# Altium PCB some_chips.PcbDoc
Units mm, origin at the board's own origin, x right, y up, seen from the top; angles counter-clockwise.
Board outline 254 x 254 mm, 2 copper layers (Top Layer, Bottom Layer); 16 components, 0 nets, 135 pads, 0 vias.
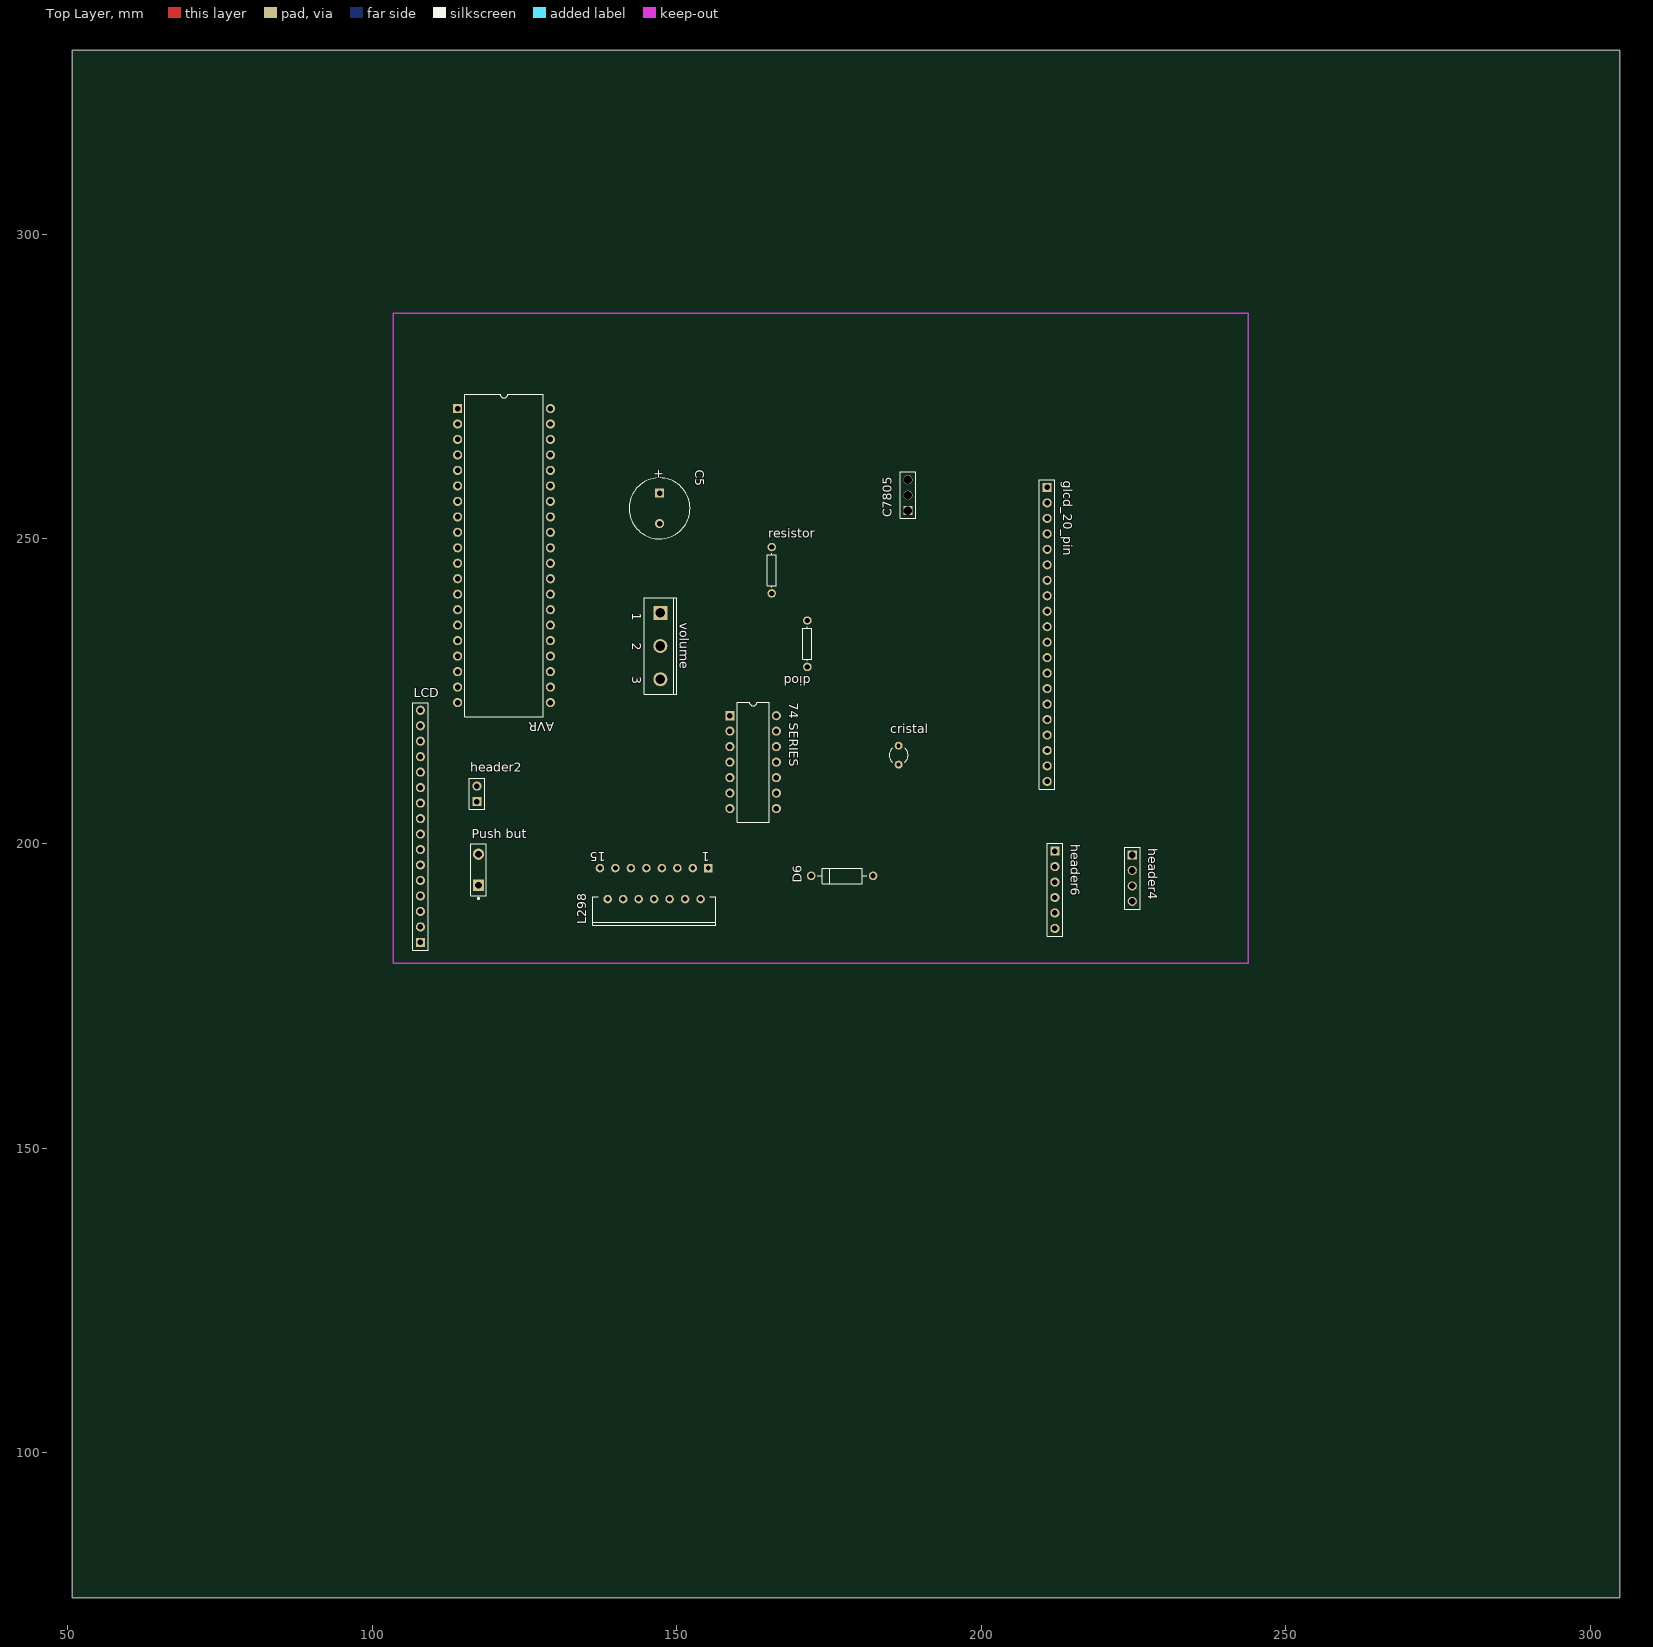
[diagram p0: Top Layer view]
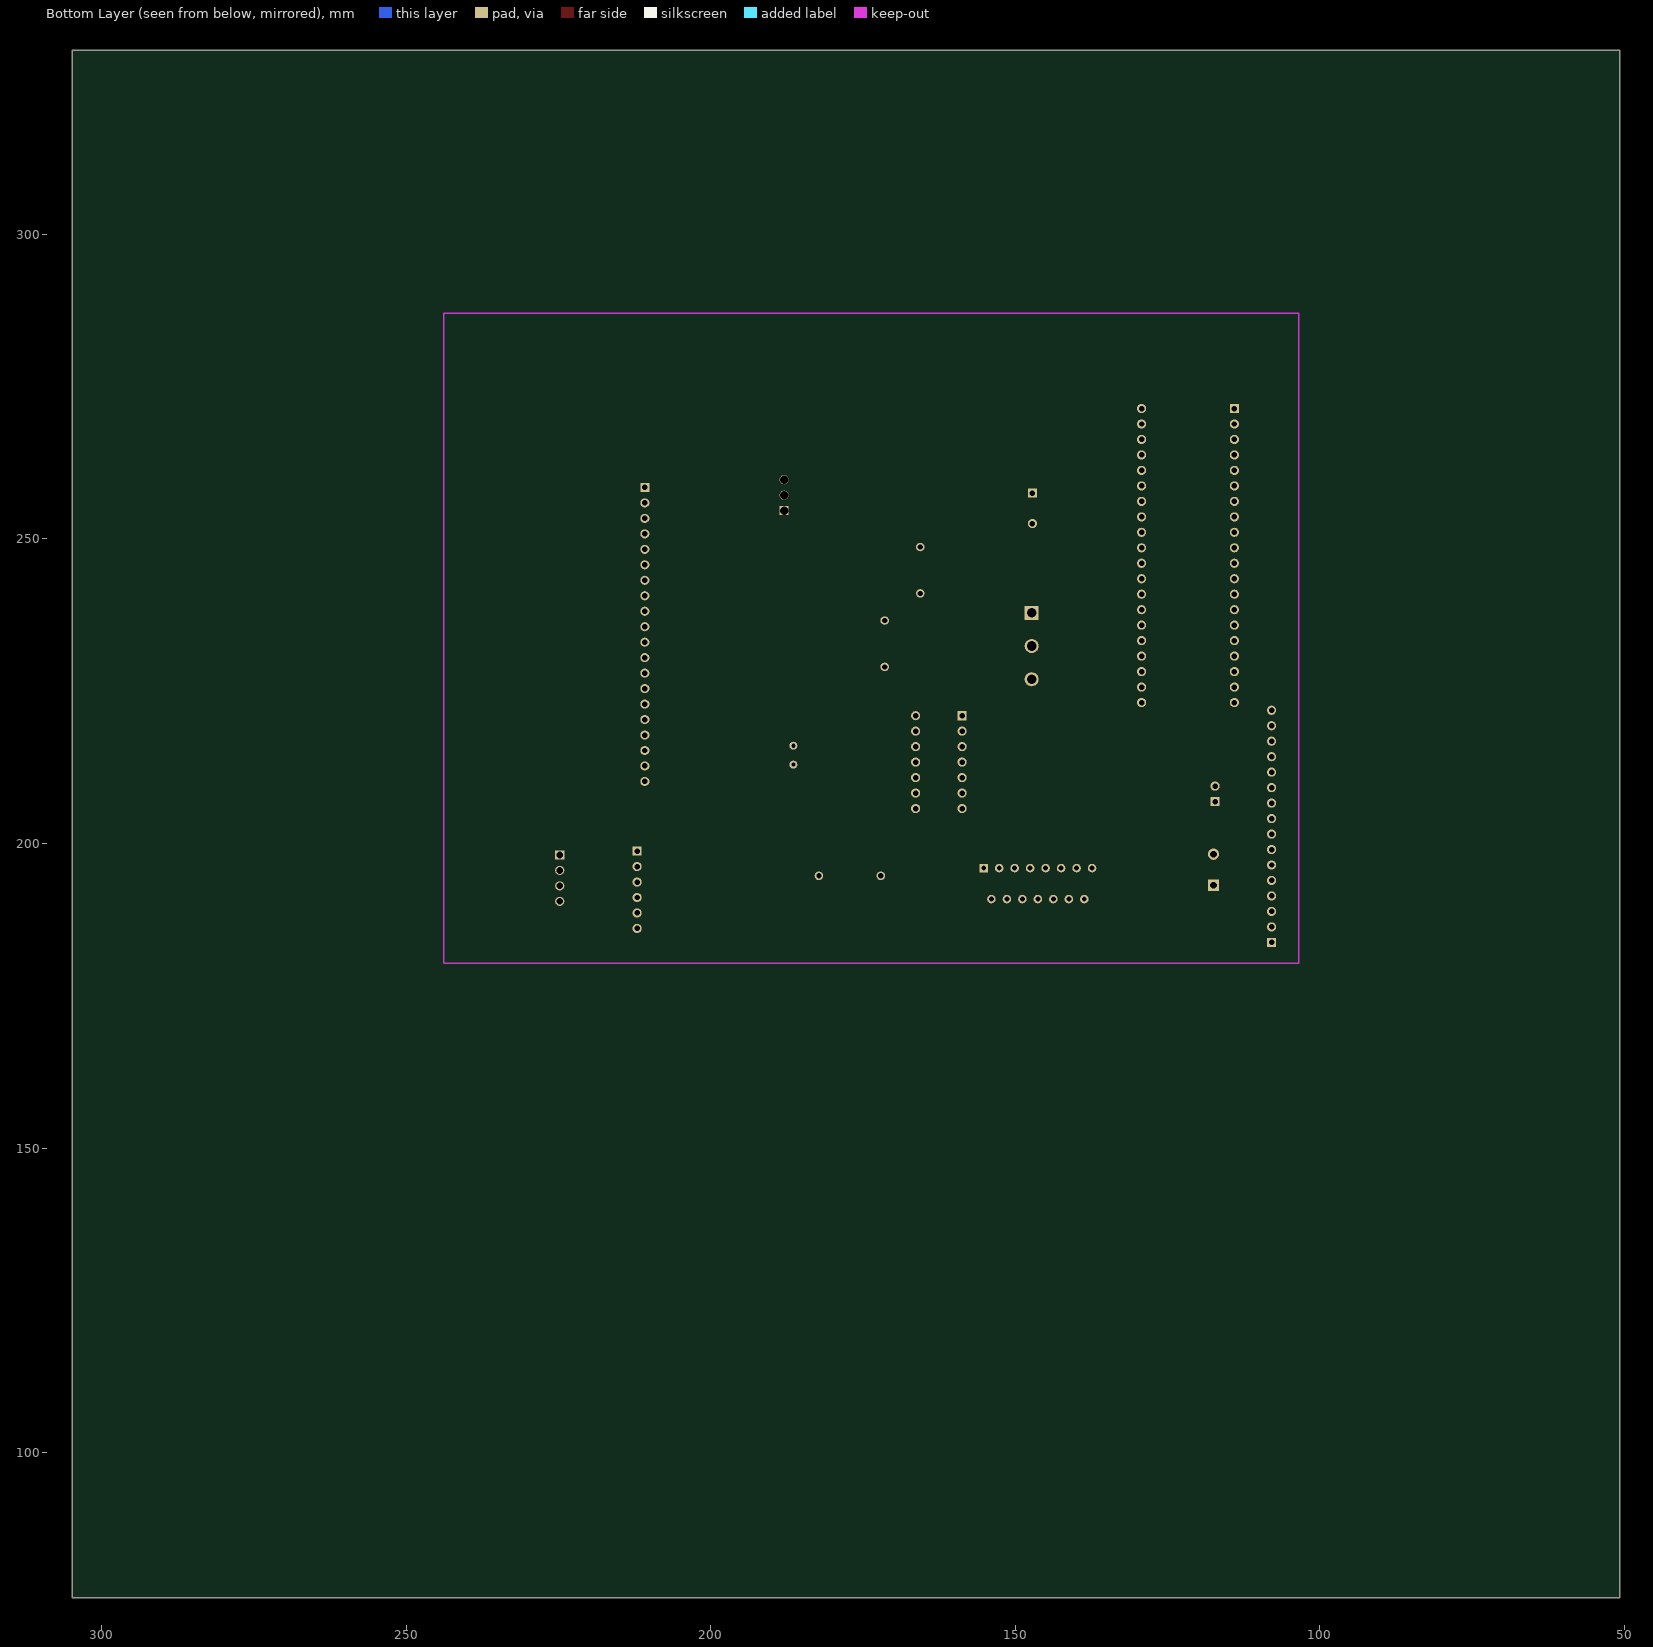
[diagram p1: Bottom Layer view, seen from below]

## Layer stack, top to bottom
Top Layer: signal copper 0.0356
Dielectric: dielectric 0.32, FR-4, Dk 4.8
Bottom Layer: signal copper 0.0356

## Board outline
50.8,76.2 304.8,76.2 304.8,330.2 50.8,330.2

## Design rules (kind name [scope] priority, off if disabled: settings)
Clearance [All] p1: gap=0.33
PolygonConnect [All] p1: connectstyle=Relief reliefconductorwidth=0.254 reliefentries=4 polygonreliefangle="90 Angle"
RoutingVias [All] p1: holewidth=0.813 width=1.575 viastyle="Through Hole" minholewidth=0.711 minwidth=1.27 maxholewidth=0.711 maxwidth=1.27
SolderMaskExpansion [All] p1: expansion=0.102
TestPointUsage [All] p1: valid=0 allowmultiple=FALSE
Testpoint [All] p1: side=15 testpointundercomponent=TRUE minsize=1.016 maxsize=2.54 preferedsize=1.524 minholesize=0 maxholesize=1.016 preferedholesize=0.813 testpointgrid=0.025 style=1023 order=0-112345678
Width Width_1 [All] p1: maxlimit=0.254 minlimit=0.254 preferedwidth=0.254
Width "12V & GND" [(InNetClass('All Nets'))] p2: maxlimit=0.635 minlimit=0.305 preferedwidth=0.305 toplayer_minwidth=0.635 toplayer_prefwidth=0.635 bottomlayer_minwidth=0.635 bottomlayer_prefwidth=0.635 minimp=50.000000 maximp=50.000000 favimp=50.000000
19 further rules are at their usual default settings.

## Components (designator, comment, footprint, x,y, rotation, side; value= is the part's Value field where it differs from the comment)
"74 SERIES" "Comment" N014 162.56,213.36 r270 top
AVR "ATmega16-16PC" 40P6 121.666,247.269 r270 top
C5 "CAPACITOR POL" CAPPR5-10x16 147.193,255.016 r270 top
C7805 "Comment" HDR1X3 187.96,254.635 r90 top
cristal "Comment" R38 186.436,214.503 r0 top
D6 "D Schottky" diode-0.4 177.165,194.691 r180 top
diod "Res1" AXIAL-0.3 171.45,232.791 r270 top
glcd_20_pin "Comment" HDR1X20 210.82,258.445 r270 top
header2 "Header 2" HDR1X2 117.221,206.883 r90 top
header4 "Comment" HDR1X4 224.79,198.12 r270 top
header6 "Comment" HDR1X6 212.09,198.755 r270 top
L298 "L298N(15)" TF15B 146.304,193.421 r180 top
LCD "Header 16" HDR1X16 107.95,183.769 r90 top
"Push but" "SW-PB" SPST-2 117.475,195.707 r90 top
resistor "Res Semi" AXIAL-0.3 165.608,244.856 r90 top
volume "Comment" TO-247 147.32,232.41 r270 top

## Footprints (in the part's own frame and the unit in brackets; to place one, negate y for a bottom-side part, rotate by r counter-clockwise, add the part's x,y. Pads: shape width x height; smd on the part's side, far side on the other; paste and mask are expansions set on the pad)
40P6 [mm]
  rect 1.5x1.5 hole 0.9: 1(-24.13,-7.62)
  round 1.5 hole 0.9: 2(-21.59,-7.62) 3(-19.05,-7.62) 4(-16.51,-7.62) 5(-13.97,-7.62) 6(-11.43,-7.62) 7(-8.89,-7.62) 8(-6.35,-7.62) 9(-3.81,-7.62) 10(-1.27,-7.62) 11(1.27,-7.62) 12(3.81,-7.62) 13(6.35,-7.62) 14(8.89,-7.62) 15(11.43,-7.62) 16(13.97,-7.62) 17(16.51,-7.62) 18(19.05,-7.62) 19(21.59,-7.62) 20(24.13,-7.62) 21(24.13,7.62) 22(21.59,7.62) 23(19.05,7.62) 24(16.51,7.62) 25(13.97,7.62) 26(11.43,7.62) 27(8.89,7.62) 28(6.35,7.62) 29(3.81,7.62) 30(1.27,7.62) 31(-1.27,7.62) 32(-3.81,7.62) 33(-6.35,7.62) 34(-8.89,7.62) 35(-11.43,7.62) 36(-13.97,7.62) 37(-16.51,7.62) 38(-19.05,7.62) 39(-21.59,7.62) 40(-24.13,7.62)
  silkscreen extent -26.5,-6.45 26.5,6.45
AXIAL-0.3 [mm]
  round 1.4 hole 0.85: 1(-3.81,0) 2(3.81,0)
  silkscreen extent -2.77,-0.76 2.77,0.76
CAPPR5-10x16 [mm]
  rect 1.5x1.5 hole 0.9: 1(-2.5,0)
  round 1.5 hole 0.9: 2(2.5,0)
  silkscreen extent -5,-5 5,5
diode-0.4 [mm]
  round 1.4 hole 0.85: 1(-5.08,0) 2(5.08,0)
  silkscreen extent -4.06,-1.27 4.06,1.27
HDR1X2 [mm]
  rect 1.5x1.5 hole 0.9: 1(0,0)
  round 1.5 hole 0.9: 2(2.54,0)
  silkscreen extent -1.27,-1.27 3.81,1.27
HDR1X3 [mm] "Connector; Header; 3 Position"
  rect 1.5x1.5 hole 1.4: 1(0,0)
  round 1.5 hole 1.4: 2(2.54,0) 3(5.08,0)
  silkscreen extent -1.27,-1.27 6.35,1.27
HDR1X4 [mm] "Connector; Header; 4 Position"
  rect 1.5x1.5 hole 1.1: 1(0,0)
  round 1.5 hole 1.1: 2(2.54,0) 3(5.08,0) 4(7.62,0)
  silkscreen extent -1.27,-1.27 8.89,1.27
HDR1X6 [mm] "Connector; Header; 6 Position"
  rect 1.5x1.5 hole 0.9: 1(0,0)
  round 1.5 hole 0.9: 2(2.54,0) 3(5.08,0) 4(7.62,0) 5(10.16,0) 6(12.7,0)
  silkscreen extent -1.27,-1.27 13.97,1.27
HDR1X16 [mm]
  rect 1.5x1.5 hole 0.9: 1(0,0)
  round 1.5 hole 0.9: 2(2.54,0) 3(5.08,0) 4(7.62,0) 5(10.16,0) 6(12.7,0) 7(15.24,0) 8(17.78,0) 9(20.32,0) 10(22.86,0) 11(25.4,0) 12(27.94,0) 13(30.48,0) 14(33.02,0) 15(35.56,0) 16(38.1,0)
  silkscreen extent -1.27,-1.27 39.37,1.27
HDR1X20 [mm] "Connector; Header; 20 Position"
  rect 1.5x1.5 hole 0.9: 1(0,0)
  round 1.5 hole 0.9: 2(2.54,0) 3(5.08,0) 4(7.62,0) 5(10.16,0) 6(12.7,0) 7(15.24,0) 8(17.78,0) 9(20.32,0) 10(22.86,0) 11(25.4,0) 12(27.94,0) 13(30.48,0) 14(33.02,0) 15(35.56,0) 16(38.1,0) 17(40.64,0) 18(43.18,0) 19(45.72,0) 20(48.26,0)
  silkscreen extent -1.27,-1.27 49.53,1.27
N014 [mm]
  rect 1.5x1.5 hole 0.9: 1(-7.62,-3.81)
  round 1.5 hole 0.9: 2(-5.08,-3.81) 3(-2.54,-3.81) 4(0,-3.81) 5(2.54,-3.81) 6(5.08,-3.81) 7(7.62,-3.81) 8(7.62,3.81) 9(5.08,3.81) 10(2.54,3.81) 11(0,3.81) 12(-2.54,3.81) 13(-5.08,3.81) 14(-7.62,3.81)
  silkscreen extent -9.85,-2.65 9.85,2.65
R38 [mm] "Crystal, Thru-Hole; 2 Leads; Body 3.1 x 8.2 mm (Dia.xH)"
  round 1.3 hole 0.7: 1(0,1.55) 2(0,-1.55)
  silkscreen extent -1.55,-1.19 1.55,1.17
SPST-2 [mm]
  rect 1.85x1.85 hole 1.1: 1(-2.54,0)
  round 1.85 hole 1.1: 2(2.54,0)
  silkscreen extent -4.89,-1.27 4.28,1.27
TF15B [mm]
  rect 1.4x1.4 hole 0.8: 1(-8.89,-2.54)
  round 1.4 hole 0.8: 2(-7.62,2.54) 3(-6.35,-2.54) 4(-5.08,2.54) 5(-3.81,-2.54) 6(-2.54,2.54) 7(-1.27,-2.54) 8(0,2.54) 9(1.27,-2.54) 10(2.54,2.54) 11(3.81,-2.54) 12(5.08,2.54) 13(6.35,-2.54) 14(7.62,2.54) 15(8.89,-2.54)
  silkscreen extent -10.1,2.14 10.1,6.84
TO-247 [mm]
  rect 2.3x2.3 hole 1.6: 1(-5.45,0)
  round 2.3 hole 1.6: 2(0,0) 3(5.45,0)
  silkscreen extent -7.95,-2.6 7.95,2.7

## Nets (pads, with @x,y where several pads share a name; then routed paths per layer and width w, separated by ;. In a path a pad name is that pad's centre, name@x,y a point inside that pad or via, vN(x,y) a via of type N, cw(c..) or ccw(c..) an arc to the next point about the centre after c; other vN are vias at no path point)
pads on no net: "74 SERIES.1" "74 SERIES.2" "74 SERIES.3" "74 SERIES.4" "74 SERIES.5" "74 SERIES.6" "74 SERIES.7" "74 SERIES.8" "74 SERIES.9" "74 SERIES.10" "74 SERIES.11" "74 SERIES.12" "74 SERIES.13" "74 SERIES.14" "Push but.1" "Push but.2" AVR.1 AVR.2 AVR.3 AVR.4 AVR.5 AVR.6 AVR.7 AVR.8 AVR.9 AVR.10 AVR.11 AVR.12 AVR.13 AVR.14 AVR.15 AVR.16 AVR.17 AVR.18 AVR.19 AVR.20 AVR.21 AVR.22 AVR.23 AVR.24 AVR.25 AVR.26 AVR.27 AVR.28 AVR.29 AVR.30 AVR.31 AVR.32 AVR.33 AVR.34 AVR.35 AVR.36 AVR.37 AVR.38 AVR.39 AVR.40 C5.1 C5.2 C7805.1 C7805.2 C7805.3 cristal.1 cristal.2 D6.1 D6.2 diod.1 diod.2 glcd_20_pin.1 glcd_20_pin.2 glcd_20_pin.3 glcd_20_pin.4 glcd_20_pin.5 glcd_20_pin.6 glcd_20_pin.7 glcd_20_pin.8 glcd_20_pin.9 glcd_20_pin.10 glcd_20_pin.11 glcd_20_pin.12 glcd_20_pin.13 glcd_20_pin.14 glcd_20_pin.15 glcd_20_pin.16 glcd_20_pin.17 glcd_20_pin.18 glcd_20_pin.19 glcd_20_pin.20 header2.1 header2.2 header4.1 header4.2 header4.3 header4.4 header6.1 header6.2 header6.3 header6.4 header6.5 header6.6 L298.1 L298.2 L298.3 L298.4 L298.5 L298.6 L298.7 L298.8 L298.9 L298.10 L298.11 L298.12 L298.13 L298.14 L298.15 LCD.1 LCD.2 LCD.3 LCD.4 LCD.5 LCD.6 LCD.7 LCD.8 LCD.9 LCD.10 LCD.11 LCD.12 LCD.13 LCD.14 LCD.15 LCD.16 resistor.1 resistor.2 volume.1 volume.2 volume.3

## Keep-outs
Keep-Out Layer:
  lines w0.254: 103.505,180.34 103.505,287.02 149.86,287.02 243.84,287.02 243.84,180.34 195.58,180.34 103.505,180.34

## Text inside footprints (layer, text, board x,y; h text height)
C5: Top Overlay "+" at 146.443,261.491 h1.5 r270
L298: Top Overlay "1" at 155.424,198.536 h1.5 r180; Top Overlay "15" at 138.354,198.536 h1.5 r180
volume: Top Overlay "1" at 142.745,237.86 h1.5 r270; Top Overlay "2" at 142.745,232.918 h1.5 r270; Top Overlay "3" at 142.745,227.468 h1.5 r270